# EAGLE board gpscircuit (EAGLE 7.6.0)
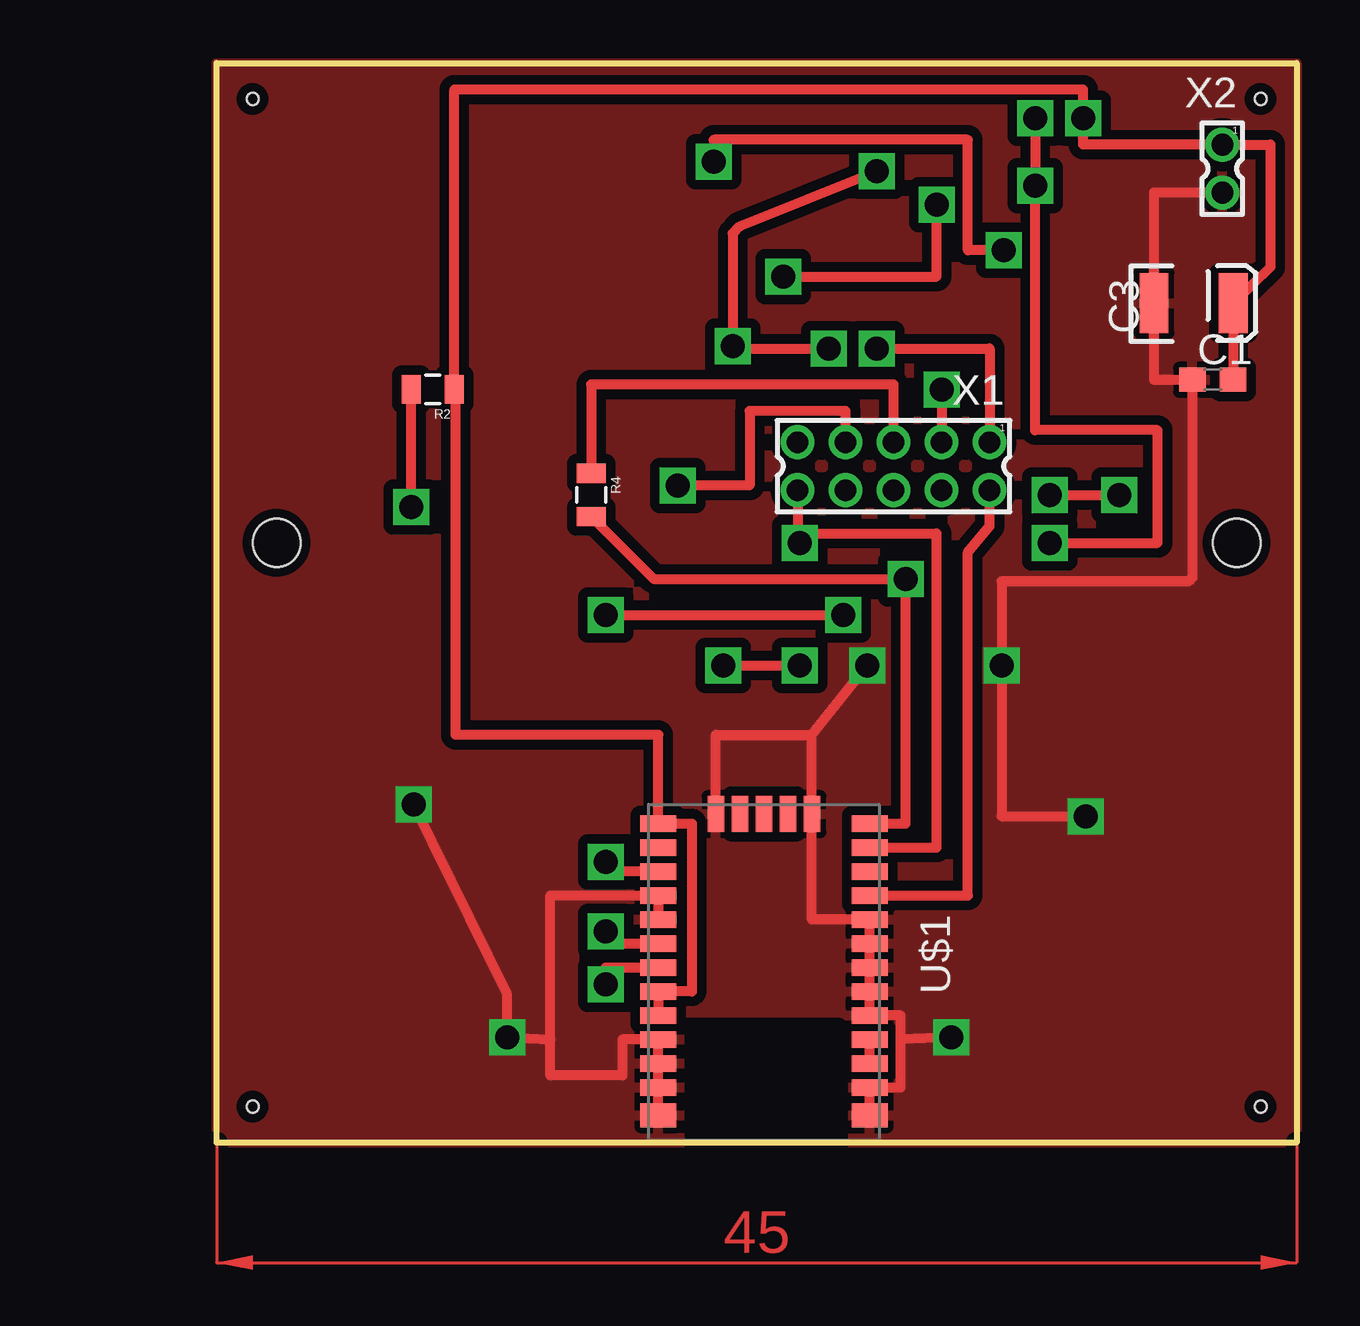
[diagram p0: board, top side]
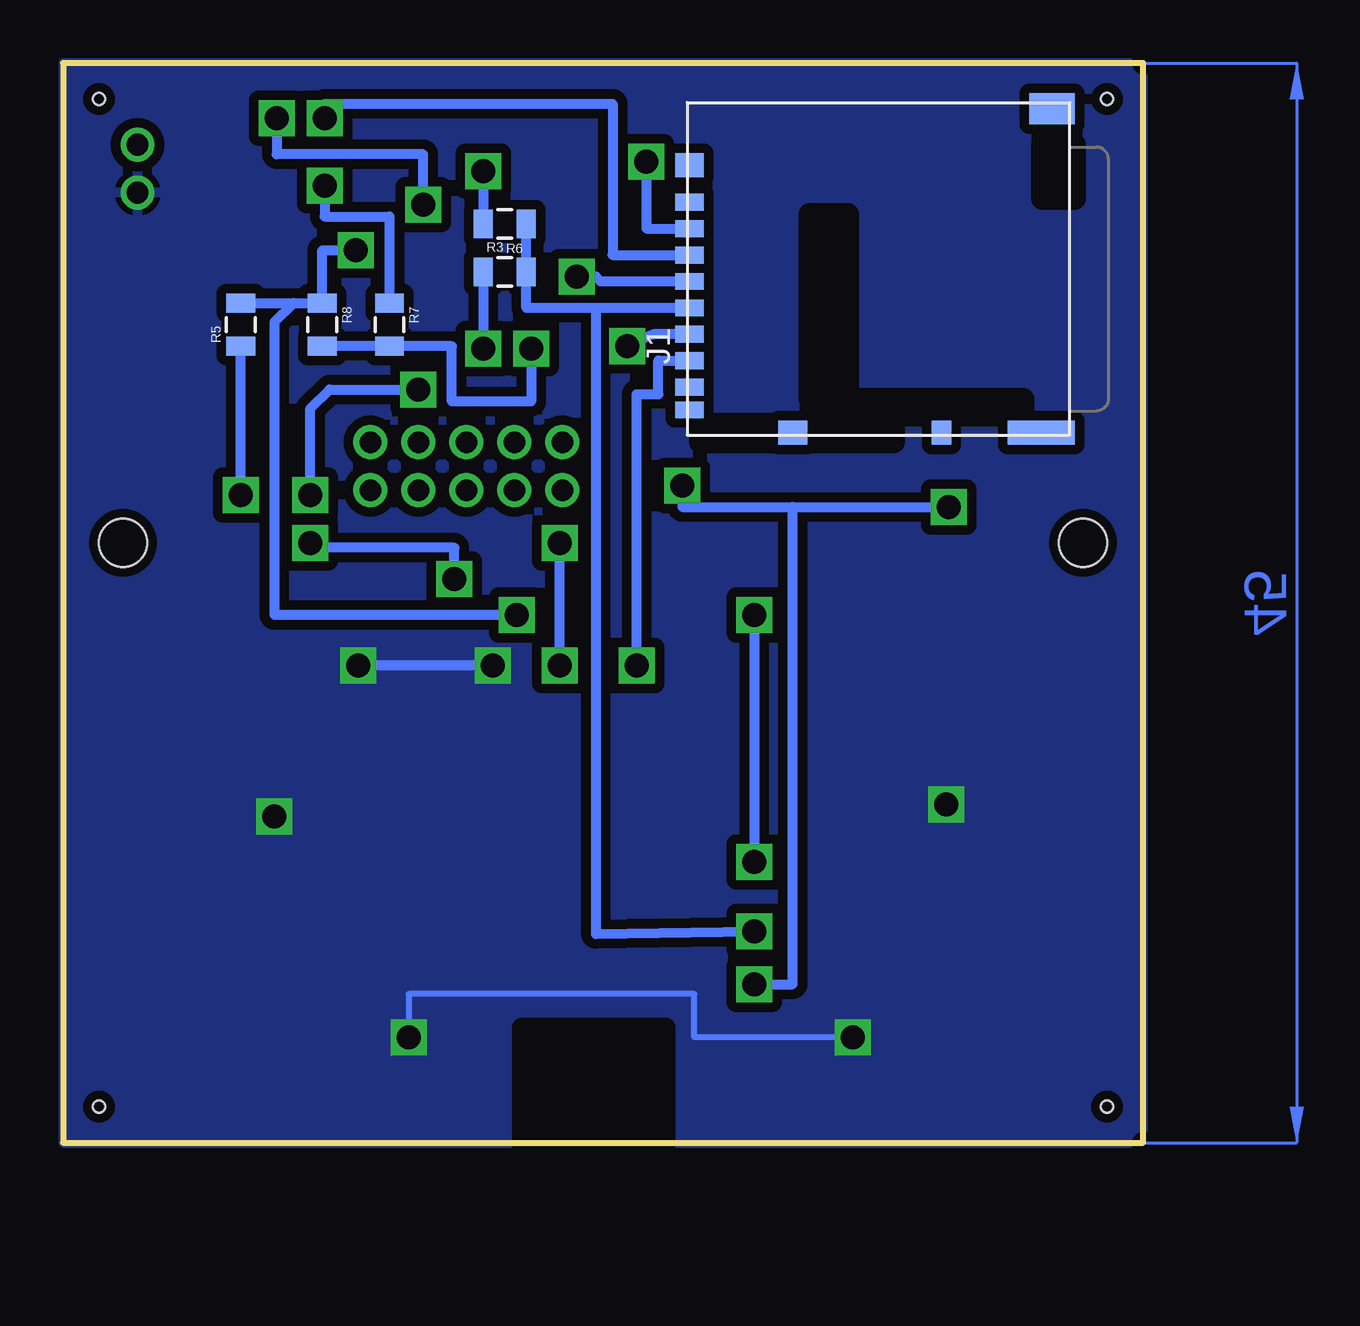
[diagram p1: board, bottom side, seen from below]

Size 45 x 45 mm. Coordinates in mm from the lower left corner, seen from the top.
Outline: 0,0 0,45 45,45 45,0 0,0
Copper layers (1*16): Top 0.035mm / dielectric 1mm / Bottom 0.035mm
Design rules "default *": minimum track width 10mil, minimum drill 1mm, track to track 8mil, track to pad 8mil, pad to pad 8mil, via to via 8mil, smd to smd 8mil, copper to edge 0mil, drill to drill 8mil, minimum pad ring 10mil, minimum via ring 8mil, stop-mask expansion 4mil, vias tented up to drill 0mil, thermal gap 10mil
Holes 2 mm at 2.5,25 42.5,25
Holes 0.5 mm at 1.5,1.5 43.5,1.5 43.5,43.5 1.5,43.5
tRestrict: area 19.9,0.1 to 25.9,4.8
bRestrict: area 19.9,0.1 to 25.9,4.8

## Footprints (pad centres in the part's own frame; a part is rotated, then mirrored left to right if it is on the bottom)
C0603 = smd 1.1 x 1: 1 -0.85,0; 2 0.85,0
EIA3528 = smd 1.2 x 2.5: A 1.65,0; C -1.65,0
DM3AT-SF-PEJM5 = smd 0.7 x 1.2: 1 3.2,-0.1; 2 2.1,-0.1; 3 1,-0.1; 4 -0.1,-0.1; 5 -1.2,-0.1; 6 -2.3,-0.1; 7 -3.4,-0.1; 8 -4.5,-0.1; B -5.45,-0.1 | smd 1 x 0.8: A -6.4,-10.6 | smd 1 x 1.2: MOUNT0 4.75,-0.1; MOUNT1 -6.4,-4.4 | smd 1 x 2.8: MOUNT2 -6.4,-14.75 | smd 1.3 x 1.9: MOUNT3 7.1,-15.2
0805 = smd 0.8 x 1.2: 1 -0.9,0; 2 0.9,0
CAM-M8Q = smd 0.7 x 1.5: 1 -6.2,-4.4; 2 -5.2,-4.4; 3 -4.2,-4.4; 4 -3.2,-4.4; 5 -2.2,-4.4; 6 -1.2,-4.4; 7 -0.2,-4.4; 8 0.8,-4.4; 9 1.8,-4.4; 10 2.8,-4.4; 11 3.8,-4.4; 12 4.8,-4.4; 15 4.8,4.4; 16 3.8,4.4; 17 2.8,4.4; 18 1.8,4.4; 19 0.8,4.4; 20 -0.2,4.4; 21 -1.2,4.4; 22 -2.2,4.4; 23 -3.2,4.4; 24 -4.2,4.4; 25 -5.2,4.4; 26 -6.2,4.4 | smd 1 x 1.5: 13 5.95,-4.4; 14 5.95,4.4 | smd 1.5 x 0.7: 27 -6.6,2; 28 -6.6,1; 29 -6.6,0; 30 -6.6,-1; 31 -6.6,-2
87758-1016 = drill 0.9 pad 1.27: 1 -4,-1; 2 -4,1; 3 -2,-1; 4 -2,1; 5 0,-1; 6 0,1; 7 2,-1; 8 2,1; 9 4,-1; 10 4,1
87758-0216 = drill 0.9 pad 1.27: 1 0,-1; 2 0,1

## Placement (x,y rotation side)
C1  4.7pF  [C0603]  41.5,31.8 0 top
C3  [EIA3528]  40.7,35 0 top
J1  DM3AT-SF-PEJM5  [DM3AT-SF-PEJM5]  19,36 90 bottom
R2  0.75  [0805]  9,31.4 180 top
R3  0.75  [0805]  26.6,36.3 0 bottom
R4  0.75  [0805]  15.6,27 270 top
R5  0.75  [0805]  37.6,34.1 90 bottom
R6  0.75  [0805]  26.6,38.3 180 bottom
R7  0.75  [0805]  31.4,34.1 270 bottom
R8  0.75  [0805]  34.2,34.1 270 bottom
U$1  CAM-M8Q  [CAM-M8Q]  22.8,7.1 270 top
X1  87758-1016  [87758-1016]  28.2,28.2 180 top
X2  87758-0216  [87758-0216]  41.9,40.6 180 top

## Library data of the parts
C1 = rcl
C3 = SparkFun-Capacitors
J1 = connector; DIGIKEY: HR1964CT-ND
R2-R8 = SparkFun-Resistors; PROD_ID: RES-08474
U$1 = elements
X1 = con-molex; MF: MOLEX; MPN: 87758-1016; OC_FARNELL: 7472340; OC_NEWARK: 59J1558
X2 = con-molex; MPN: 87758-0216; OC_FARNELL: unknown; OC_NEWARK: 94M1513

## Nets
3.3V: C1.2 C3.A J1.4 R2.1 U$1.1 U$1.8 U$1.9 X2.1
GND: C1.1 C3.C U$1.4 U$1.5 U$1.10 U$1.11 U$1.12 U$1.13 U$1.14 U$1.15 U$1.18 U$1.19 U$1.20 U$1.21 U$1.22 U$1.27 U$1.31 X2.2
N$1: U$1.16 U$1.17
N$2: U$1.23 X1.2
N$3: R2.2 U$1.7 X1.7
N$4: J1.7 U$1.25 X1.10
N$5: R4.1 X1.5
N$6: R5.1 X1.3
N$7: J1.6 R6.2 R7.2 R8.2
N$8: R3.1 X1.1
N$12: J1.5 R3.2 R6.1 U$1.6
N$14: J1.2 R5.2 R8.1 U$1.3
N$16: J1.3 R4.2 R7.1 U$1.26

## Tracks (layer width: path | path; a pad name or v marks a point on that pad's centre or on a via)
3.3V  (via drill 1)
  Top 0.406: v23.6,36.1 30,36.1 v30,39.1 | U$1.9 U$1.8 19.8,6.3 19.8,13.3 U$1.1 18.4,17 9.95,17 9.95,31.85 9.9,31.9 | R2.1 9.9,31.9 | 9.9,31.9 9.9,43.9 36.1,43.9 v36.1,42.7 36.1,41.6 X2.1 43.9,41.6 43.9,36.5 C3.A C1.2
  Bottom 0.406: v30,39.1 30,41.2 36.1,41.2 v36.1,42.7 | v23.6,36.1 22.8,36.1 22.6,35.9 J1.4
GND  (via drill 1)
  Top 0.406: U$1.31 20.8,17 24.8,17 | 24.8,17 U$1.27 24.8,9.3 U$1.22 U$1.21 U$1.20 U$1.19 U$1.18 28.5,5.3 28.5,4.3 | 24.8,17 v27.1,19.9 | U$1.14 U$1.15 28.5,2.3 28.5,4.3 | U$1.13 U$1.12 U$1.11 U$1.10 16.9,4.3 16.9,2.8 13.9,2.8 13.9,4.3 | U$1.5 U$1.4 13.9,10.3 13.9,4.3 | 13.9,4.3 v12.1,4.4 12.1,6.2 v8.2,14.1 | 28.5,4.3 v30.6,4.4 30.6,4.9 | v36.2,13.6 32.7,13.6 v32.7,19.9 32.7,23.4 40.5,23.4 40.65,23.55 C1.1 39.05,31.8 C3.C 39.05,39.6 X2.2 40.45,39.6
  Bottom 0.254: v12.1,4.4 18.7,4.4 18.7,6.2 30.6,6.2 v30.6,4.4
  Bottom 0.406: v27.1,19.9 v32.7,19.9
  pour Bottom (isolate 0.406): 0,45 45,45 45,0 0,0
  pour Top (isolate 0.406): 0,0 0,45 45,45 45,0
N$1
  Top 0.406: U$1.16 U$1.17
N$2
  Top 0.406: U$1.23 31.3,10.3 31.3,24.6 32.2,25.7 X1.2
N$3  (via drill 1)
  Top 0.406: v8.1,26.5 R2.2 | v16.2,6.6 16.2,7.3 U$1.7 | X1.7 26.2,30.5 22.2,30.5 22.2,27.4 v19.2,27.4
  Bottom 0.406: v19.2,27.4 19.2,26.5 14.6,26.5 | 14.6,26.5 v8.1,26.5 | v16.2,6.6 14.6,6.6 14.6,26.5
N$4  (via drill 1)
  Top 0.406: U$1.25 30,12.3 30,25.4 24.3,25.4 | X1.10 24.2,25.4 24.3,25.4 | v21.1,19.9 v24.3,19.9 | 24.3,25.4 v24.3,25
  Bottom 0.406: J1.7 20.2,32.6 20.2,31.2 21.1,31.2 v21.1,19.9 | v24.3,19.9 v24.3,25
N$5
  Top 0.406: X1.5 28.2,31.6 15.6,31.6 R4.1
N$6  (via drill 1)
  Top 0.406: v30.2,31.4 X1.3 | v34.7,27 v37.6,27
  Bottom 0.406: v34.7,27 34.7,30.6 33.9,31.4 v30.2,31.4 | v37.6,27 R5.1
N$7  (via drill 1, 1 pad 1)
  Top 0.406: v27.5,40.5 21.8,38.2 21.5,37.9 v21.5,33.2 21.6,33.1 v25.5,33.1
  Bottom 0.406: v27.5,40.5 R6.2 | J1.6 20.4,33.7 v21.5,33.2 | R8.2 R7.2 28.8,33.2 28.8,30.9 25.5,30.9 v25.5,33.1
N$8  (via drill 1)
  Top 0.406: v27.5,33.1 32.2,33.1 X1.1
  Bottom 0.406: R3.1 v27.5,33.1
N$12  (via drill 1)
  Top 0.406: v16.2,8.8 16.2,8.3 U$1.6
  Bottom 0.406: 22.8,34.8 J1.5 | R6.1 R3.2 25.7,34.8 22.8,34.8 | 22.8,34.8 22.8,8.7 v16.2,8.8
N$14  (via drill 1)
  Top 0.406: 18.4,11.4 U$1.3 16.2,11.3 v16.2,11.7 | v16.2,22 v26.1,22 | v32.8,37.2 31.3,37.2 31.3,41.8 20.7,41.8 v20.7,40.9
  Bottom 0.406: v32.8,37.2 34.2,37.2 R8.1 35.4,35 | v20.7,40.9 20.7,38.1 J1.2 | 35.4,35 36.2,34.2 36.2,22 v26.1,22 | 16.2,11.8 v16.2,11.7 v16.2,22 | R5.2 35.4,35
N$16  (via drill 1)
  Top 0.406: U$1.26 28.7,13.3 v28.7,23.5 18.2,23.5 R4.2 | v34.1,42.7 v34.1,39.9 34.1,29.7 39.2,29.7 39.2,25 v34.7,25
  Bottom 0.406: v28.7,23.5 28.7,24.8 34.7,24.8 v34.7,25 | R7.1 31.4,38.6 34.1,38.6 v34.1,39.9 | J1.3 22.1,37 22.1,43.3 34.1,43.3 v34.1,42.7
(copper drawn outside any net)
  shapes: Bottom area x1, Top area x1